# EAGLE board schéma_panel (EAGLE 8.4.0)
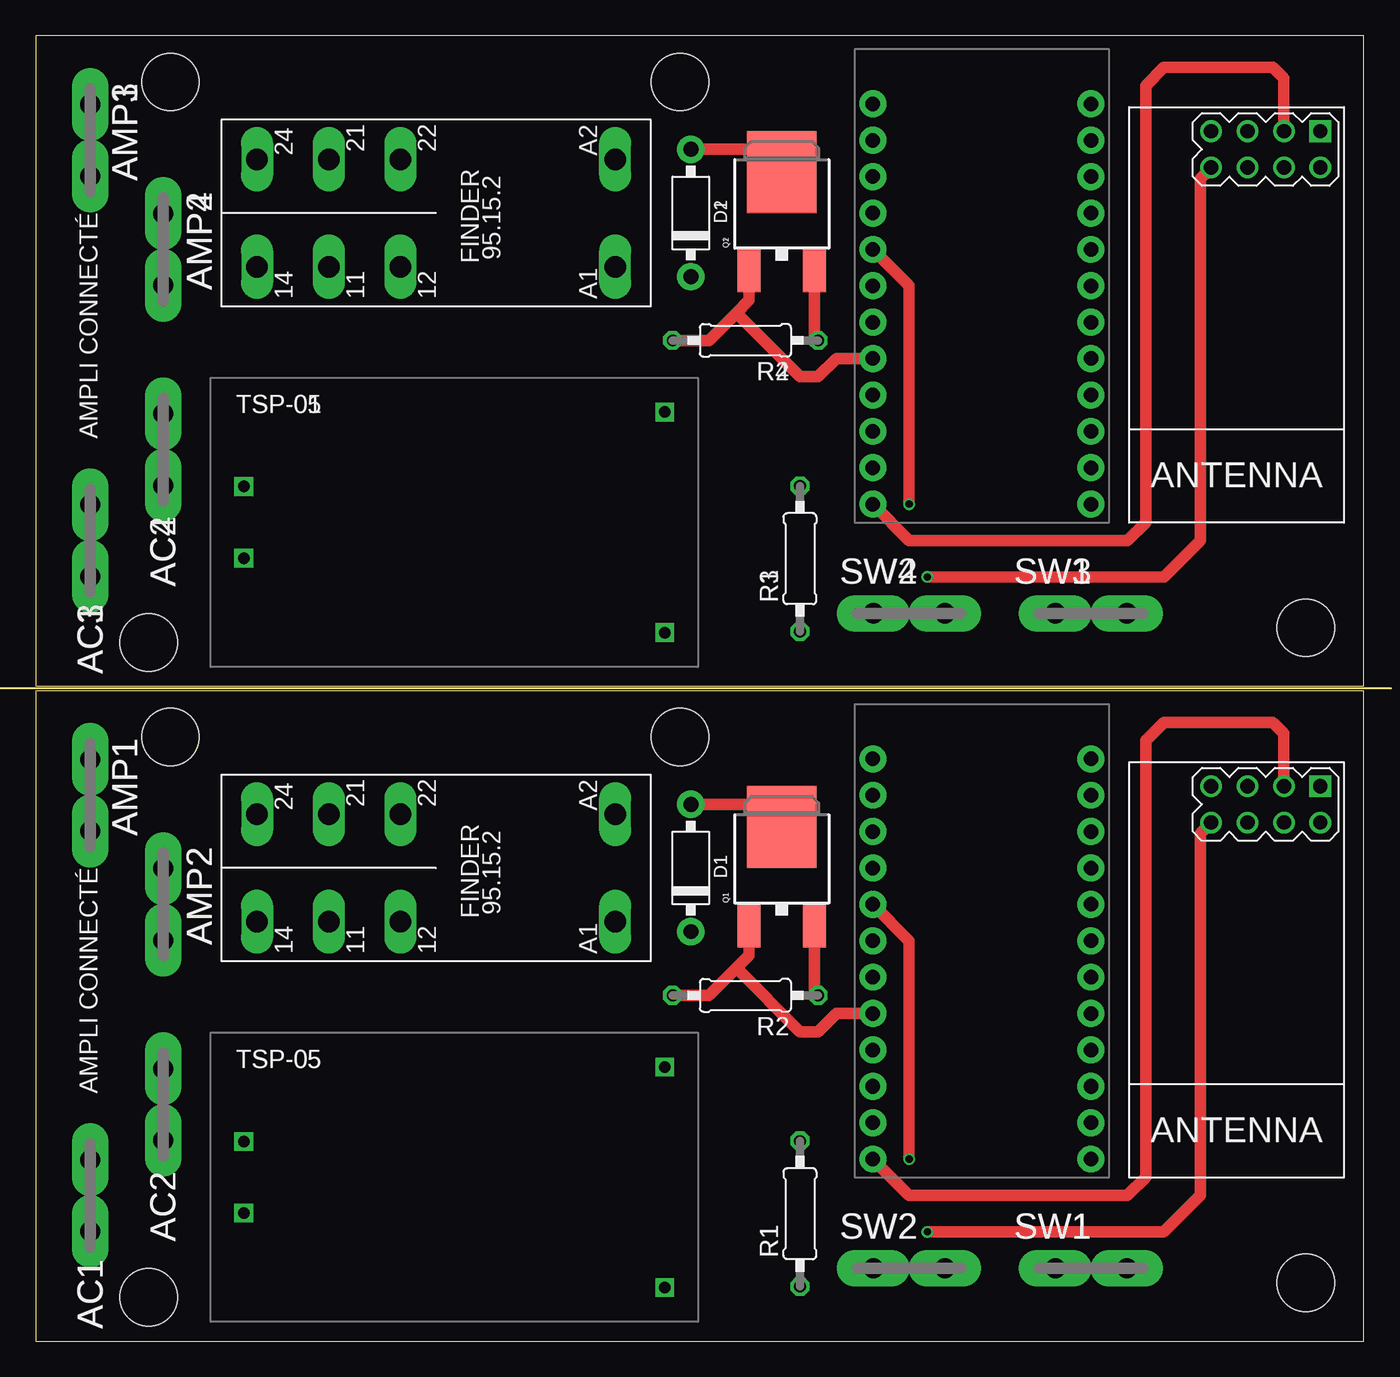
[diagram p0: board, top side]
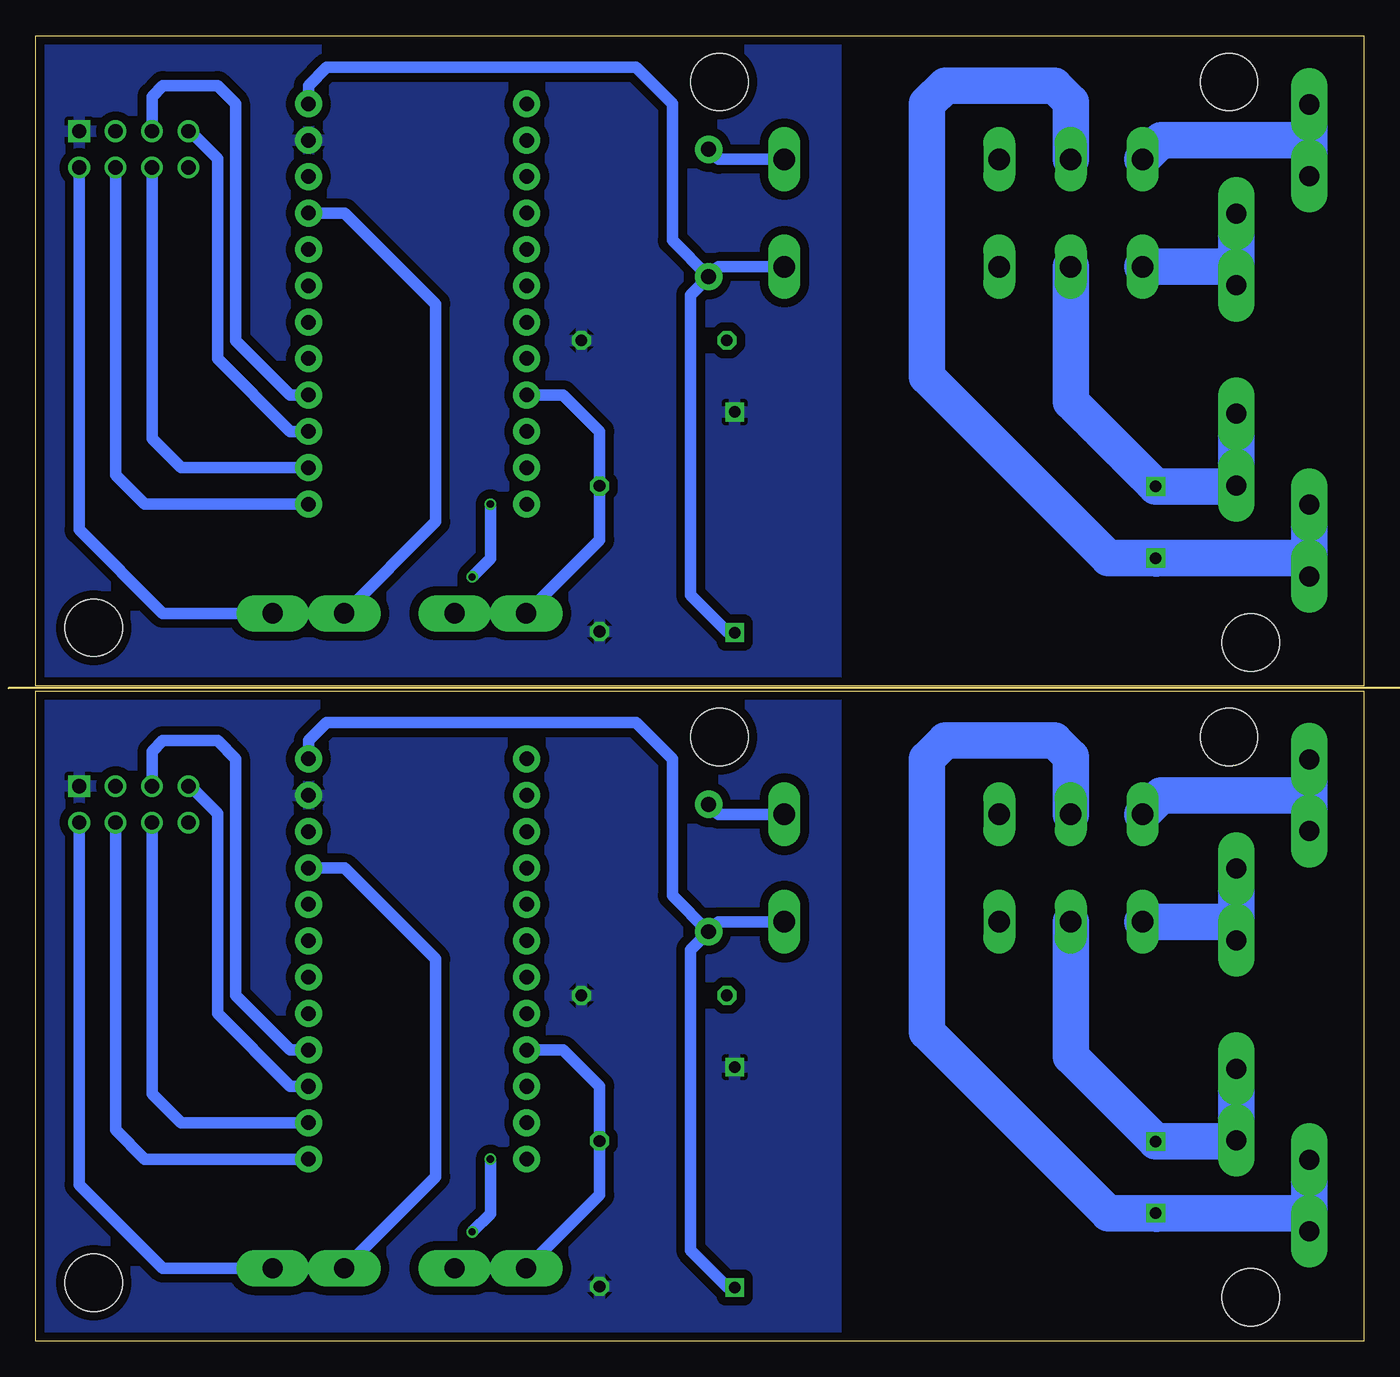
[diagram p1: board, bottom side, seen from below]

Size 92.69 x 91.11 mm. Coordinates in mm from the lower left corner, seen from the top.
Outline: 0,0 92.69,0 92.69,45.39 0,45.39 0,0
Outline: 0,45.72 92.69,45.72 92.69,91.11 0,91.11 0,45.72
Copper layers (1*16): Top 0.035mm / dielectric 1.5mm / Bottom 0.035mm
Design rules "SeeedStudio_2layer_DRU_no_angle_20140221": minimum track width 6mil, minimum drill 12mil, track to track 6mil, track to pad 6mil, pad to pad 6mil, via to via 6mil, smd to smd 0mil, copper to edge 10mil, drill to drill 10mil, minimum pad ring 10mil, minimum via ring 6mil, stop-mask expansion 2mil, vias tented up to drill 100mil, thermal gap 10mil
Holes 4 mm at 9.4,42.16 7.87,3.05 44.96,42.16 88.65,4.06 9.4,87.88 7.87,48.77 44.96,87.88 88.65,49.78
Milling: 1 lines

## Footprints (pad centres in the part's own frame; a part is rotated, then mirrored left to right if it is on the bottom)
F061.100 = drill 1.4 pad 2.54 long: A1 -2.5,0; A2 2.5,0
DO-41 = drill 1.041 pad 1.905: 1 -4.445,0; 2 4.445,0
WIRELESS-NRF24L01 = drill 1 square: 1 -12.7,6.35 | drill 1: 2 -10.16,6.35; 3 -12.7,3.81; 4 -10.16,3.81; 5 -12.7,1.27; 6 -10.16,1.27; 7 -12.7,-1.27; 8 -10.16,-1.27
ARDUINO_MINI = drill 1.016 pad 1.88: 1 -7.62,12.7; 2 -7.62,10.16; 3 -7.62,7.62; 4 -7.62,5.08; 5 -7.62,2.54; 6 -7.62,0; 7 -7.62,-2.54; 8 -7.62,-5.08; 9 -7.62,-7.62; 10 -7.62,-10.16; 11 -7.62,-12.7; 12 -7.62,-15.24; 13 7.62,-15.24; 14 7.62,-12.7; 15 7.62,-10.16; 16 7.62,-7.62; 17 7.62,-5.08; 18 7.62,-2.54; 19 7.62,0; 20 7.62,2.54; 21 7.62,5.08; 22 7.62,7.62; 23 7.62,10.16; 24 7.62,12.7
DPAK = smd 1.6 x 3: 1 -2.28,-5.31; 3 2.28,-5.31 | smd 4.826 x 5.715: 4 0,1.588
0207/10 = drill 0.813 octagon: 1 -5.08,0; 2 5.08,0
95.15.2 = drill 1.5 long: 11 -3.75,7.5; 12 -3.75,2.5; 14 -3.75,12.5; 21 3.75,7.5; 22 3.75,2.5; 24 3.75,12.5; A1 -3.75,-12.5; A2 3.75,-12.5
HKLPM01 = drill 0.8 square: P$1 -14.7,2.5; P$2 -14.7,-2.5; P$3 14.7,7.7; P$4 14.7,-7.7

## Placement (x,y rotation side)
AC1  [F061.100]  3.81,10.16 90 top
AC2  [F061.100]  8.89,16.51 90 top
AC3  [F061.100]  3.81,55.88 90 top
AC4  [F061.100]  8.89,62.23 90 top
AMP1  [F061.100]  3.81,38.1 90 top
AMP2  [F061.100]  8.89,30.48 90 top
AMP3  [F061.100]  3.81,83.82 90 top
AMP4  [F061.100]  8.89,76.2 90 top
D1  1N4002  [DO-41]  45.72,33.02 270 top
D2  1N4002  [DO-41]  45.72,78.74 270 top
M1  WIRELESS-NRF24L01  [WIRELESS-NRF24L01]  83.31,26.04 270 top
M2  WIRELESS-NRF24L01  [WIRELESS-NRF24L01]  83.31,71.75 270 top
P1  ARDUINO MINI  [ARDUINO_MINI]  66.04,27.94 0 top
P2  ARDUINO MINI  [ARDUINO_MINI]  66.04,73.66 0 top
Q1  FDD8780  [DPAK]  52.07,34.29 0 top
Q2  FDD8780  [DPAK]  52.07,80.01 0 top
R1  1k  [0207/10]  53.34,8.89 90 top
R2  10k  [0207/10]  49.53,24.13 180 top
R3  1k  [0207/10]  53.34,54.61 90 top
R4  10k  [0207/10]  49.53,69.85 180 top
RL1  95.15.2  [95.15.2]  27.94,33.02 90 top
RL2  95.15.2  [95.15.2]  27.94,78.74 90 top
SW1  [F061.100]  73.66,5.08 180 top
SW2  [F061.100]  60.96,5.08 0 top
SW3  [F061.100]  73.66,50.8 180 top
SW4  [F061.100]  60.96,50.8 0 top
TSP-01  HKLPM01  [HKLPM01]  29.21,57.15 0 top
TSP-05  HKLPM01  [HKLPM01]  29.21,11.43 0 top

## Library data of the parts
AC1-AC4 AMP1-AMP4 SW1-SW4 = con-faston; OC_FARNELL: unknown; OC_NEWARK: unknown
D1 D2 = Seeed-OPL-Diode; MPN: 1N4001
M1 M2 = nRF24
P1 P2 = SparkFun-Boards
Q1 Q2 = SparkFun-DiscreteSemi; PROD_ID: TRANS-09984
R1-R4 = resistor
RL1 RL2 = relay_finder
TSP-01 TSP-05 = HKLPM01

## Nets
3.3V: M1.2 P1.21 SW1.A1 SW1.A2
3.3V1: M2.2 P2.21 SW3.A1 SW3.A2
+5V: D1.2 P1.24 RL1.A1 TSP-05.P$4
+5V1: D2.2 P2.24 RL2.A1 TSP-01.P$4
CE: M1.3 P1.12
CE1: M2.3 P2.12
CSN: M1.4 P1.13
CSN1: M2.4 P2.13
GND: M1.1 P1.23 Q1.3 R1.1 R2.1 TSP-05.P$3
GND1: M2.1 P2.23 Q2.3 R3.1 R4.1 TSP-01.P$3
IRQ: M1.8 P1.5
IRQ1: M2.8 P2.5
MISO: M1.7 P1.15
MISO1: M2.7 P2.15
MOSI: M1.6 P1.14
MOSI1: M2.6 P2.14
N$1: AC1.A1 AC1.A2 RL1.21 TSP-05.P$2
N$2: AC2.A1 AC2.A2 RL1.11 TSP-05.P$1
N$3: AMP2.A1 AMP2.A2 RL1.14
N$4: AMP1.A1 AMP1.A2 RL1.24
N$5: P1.8 Q1.1 R2.2
N$6: D1.1 Q1.4 RL1.A2
N$7: AC4.A1 AC4.A2 RL2.11 TSP-01.P$1
N$8: AC3.A1 AC3.A2 RL2.21 TSP-01.P$2
N$9: AMP4.A1 AMP4.A2 RL2.14
N$10: AMP3.A1 AMP3.A2 RL2.24
N$11: D2.1 Q2.4 RL2.A2
N$12: P2.8 Q2.1 R4.2
SCK: M1.5 P1.16
SCK1: M2.5 P2.16
SW: P1.9 R1.2 SW2.A1 SW2.A2
SW1: P2.9 R3.2 SW4.A1 SW4.A2

## Tracks (layer width: path | path; a pad name or v marks a point on that pad's centre or on a via)
3.3V
  Bottom 0.813: P1.21 71.12,33.02 64.77,26.67 64.77,11.47 SW1.A2 76.2,5.08 | M1.2 89.66,10.92 83.82,5.08 76.2,5.08 | 76.2,5.08 SW1.A1
3.3V1
  Bottom 0.813: P2.21 71.12,78.74 64.77,72.39 64.77,57.19 SW3.A2 76.2,50.8 | M2.2 89.66,56.64 83.82,50.8 76.2,50.8 | 76.2,50.8 SW3.A1
+5V
  Bottom 0.813: RL1.A1 45.02,29.27 D1.2 | D1.2 46.99,27.3 46.99,6.35 44.37,3.73 TSP-05.P$4 | P1.24 73.66,41.91 72.39,43.18 50.8,43.18 48.26,40.64 48.26,31.11 D1.2
+5V1
  Bottom 0.813: RL2.A1 45.02,74.99 D2.2 | D2.2 46.99,73.03 46.99,52.07 44.37,49.45 TSP-01.P$4 | P2.24 73.66,87.63 72.39,88.9 50.8,88.9 48.26,86.36 48.26,76.83 D2.2
CE
  Top 0.813: M1.3 87.12,42.42 86.36,43.18 78.74,43.18 77.47,41.91 77.47,11.43 76.2,10.16 60.96,10.16 P1.12
CE1
  Top 0.813: M2.3 87.12,88.14 86.36,88.9 78.74,88.9 77.47,87.63 77.47,57.15 76.2,55.88 60.96,55.88 P2.12
CSN
  Bottom 0.813: P1.13 85.09,12.7 87.12,14.73 M1.4
CSN1
  Bottom 0.813: P2.13 85.09,58.42 87.12,60.45 M2.4
GND
  Top 0.813: R2.1 54.35,24.39 Q1.3
  pour Bottom (isolate 0.61): 36.83,44.7 36.83,0.51 92.2,0.51 92.2,44.7
GND1
  Top 0.813: R4.1 54.35,70.11 Q2.3
  pour Bottom (isolate 0.61): 36.83,90.42 36.83,46.23 92.2,46.23 92.2,90.42
IRQ  (via drill 0.5)
  Top 0.813: M1.8 81.28,35.43 81.28,10.16 78.74,7.62 v62.23,7.62 | v60.96,12.7 60.96,27.94 P1.5
  Bottom 0.813: v62.23,7.62 60.96,8.89 v60.96,12.7
IRQ1  (via drill 0.5)
  Top 0.813: M2.8 81.28,81.15 81.28,55.88 78.74,53.34 v62.23,53.34 | v60.96,58.42 60.96,73.66 P2.5
  Bottom 0.813: v62.23,53.34 60.96,54.61 v60.96,58.42
MISO
  Bottom 0.813: M1.7 81.92,38.73 80.01,36.83 80.01,22.86 74.93,17.78 P1.15
MISO1
  Bottom 0.813: M2.7 81.92,84.45 80.01,82.55 80.01,68.58 74.93,63.5 P2.15
MOSI
  Bottom 0.813: M1.6 84.58,17.27 82.55,15.24 P1.14
MOSI1
  Bottom 0.813: M2.6 84.58,62.99 82.55,60.96 P2.14
N$1
  Bottom 2.54: 14.47,8.89 TSP-05.P$2 | TSP-05.P$2 17.82,8.93 30.48,21.59 30.48,40.64 29.21,41.91 21.59,41.91 20.44,40.76 RL1.21 | TSP-05.P$2 3.85,8.93 3.81,8.89 AC1.A1 AC1.A2
N$2
  Bottom 2.54: RL1.11 20.44,19.86 TSP-05.P$1 8.97,13.93 AC2.A1 AC2.A2
N$3
  Bottom 2.54: RL1.14 8.95,29.27 8.89,29.21 AMP2.A1 AMP2.A2
N$4
  Bottom 2.54: RL1.24 14.11,38.1 3.81,38.1 | 3.81,38.1 AMP1.A2 | AMP1.A1 3.81,38.1
N$5
  Top 0.813: R2.2 46.99,24.13 48.89,26.04 | 48.89,26.04 49.79,26.93 Q1.1 | P1.8 55.88,22.86 54.61,21.59 53.34,21.59 48.89,26.04
N$6
  Top 0.813: Q1.4 50.48,37.47 D1.1
  Bottom 0.813: RL1.A2 45.02,36.77 D1.1
N$7
  Bottom 2.54: RL2.11 20.44,65.58 TSP-01.P$1 8.97,59.65 AC4.A1 AC4.A2
N$8
  Bottom 2.54: 14.47,54.61 TSP-01.P$2 | TSP-01.P$2 17.82,54.65 30.48,67.31 30.48,86.36 29.21,87.63 21.59,87.63 20.44,86.48 RL2.21 | TSP-01.P$2 3.85,54.65 3.81,54.61 AC3.A1 AC3.A2
N$9
  Bottom 2.54: RL2.14 8.95,74.99 8.89,74.93 AMP4.A1 AMP4.A2
N$10
  Bottom 2.54: RL2.24 14.11,83.82 3.81,83.82 | 3.81,83.82 AMP3.A2 | AMP3.A1 3.81,83.82
N$11
  Top 0.813: Q2.4 50.48,83.19 D2.1
  Bottom 0.813: RL2.A2 45.02,82.49 D2.1
N$12
  Top 0.813: R4.2 46.99,69.85 48.89,71.75 | 48.89,71.75 49.79,72.65 Q2.1 | P2.8 55.88,68.58 54.61,67.31 53.34,67.31 48.89,71.75
SCK
  Bottom 0.813: M1.5 84.58,41.15 83.82,41.91 80.01,41.91 78.74,40.64 78.74,24.13 74.93,20.32 P1.16
SCK1
  Bottom 0.813: M2.5 84.58,86.87 83.82,87.63 80.01,87.63 78.74,86.36 78.74,69.85 74.93,66.04 P2.16
SW
  Bottom 0.813: P1.9 55.88,20.32 53.34,17.78 R1.2 53.34,10.2 SW2.A1 SW2.A2
SW1
  Bottom 0.813: P2.9 55.88,66.04 53.34,63.5 R3.2 53.34,55.92 SW4.A1 SW4.A2

## Text on the board
Milling: V-CUT
_tPlace: TSP-05 | TSP-05
_tNames: AMP1 | D1 | Q1 | AMP2 | R2 | AMPLI CONNECTÉ | SW1 | AC2 | SW2 | R1 | AC1 | AMP1 | D1 | Q1 | AMP2 | R2 | AMPLI CONNECTÉ | SW1 | AC2 | SW2 | R1 | AC1